# EAGLE board boost_controller (EAGLE 9.6.1)
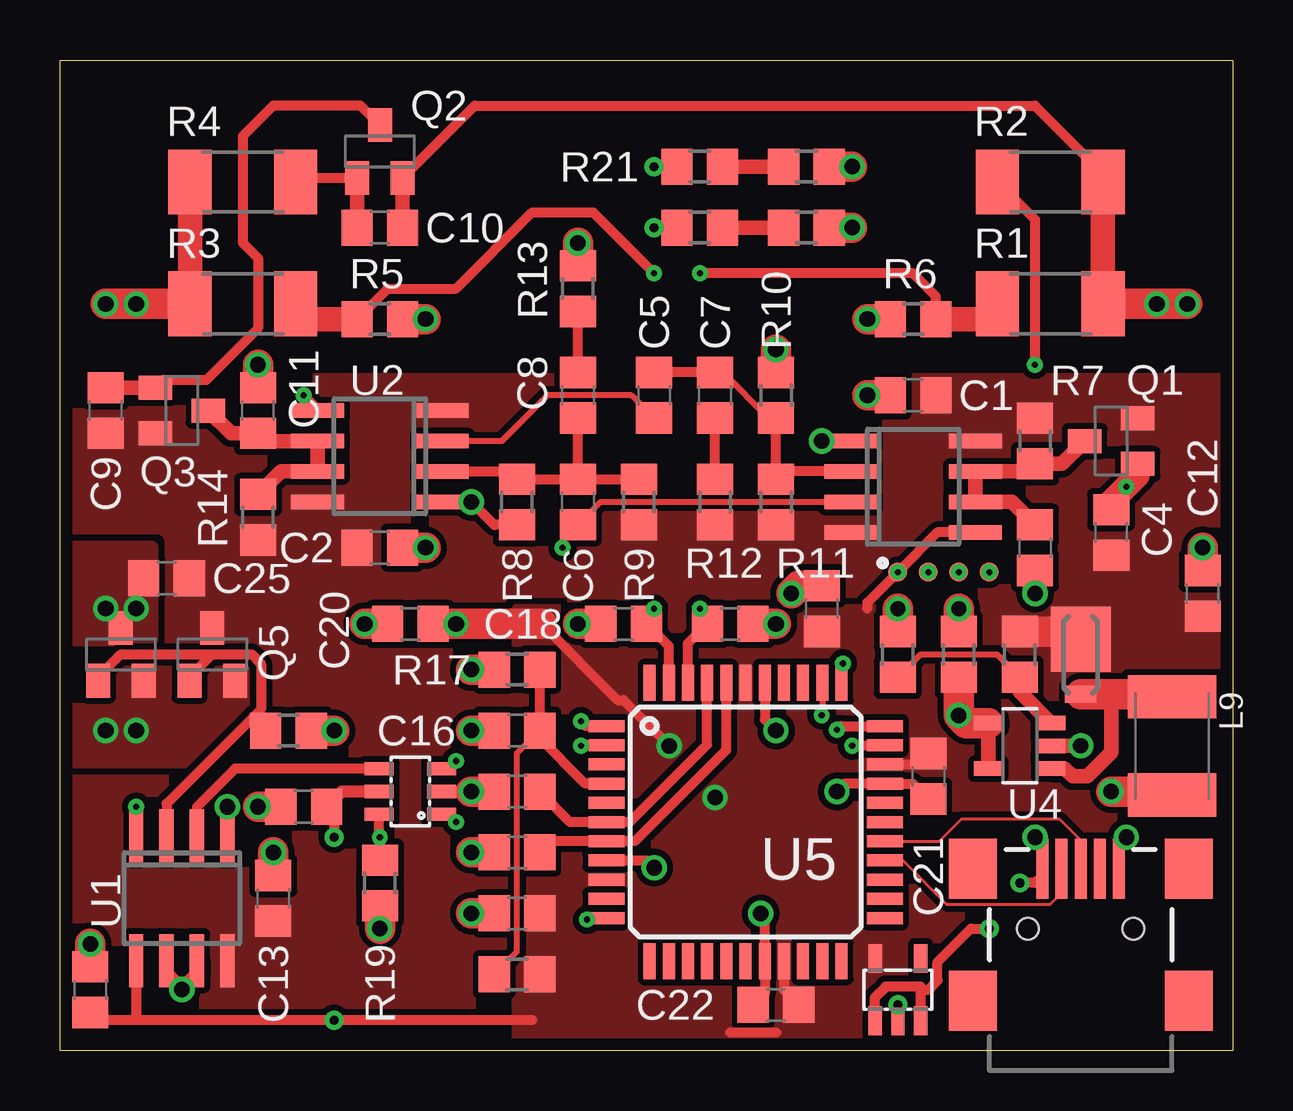
[diagram p0: board, top side]
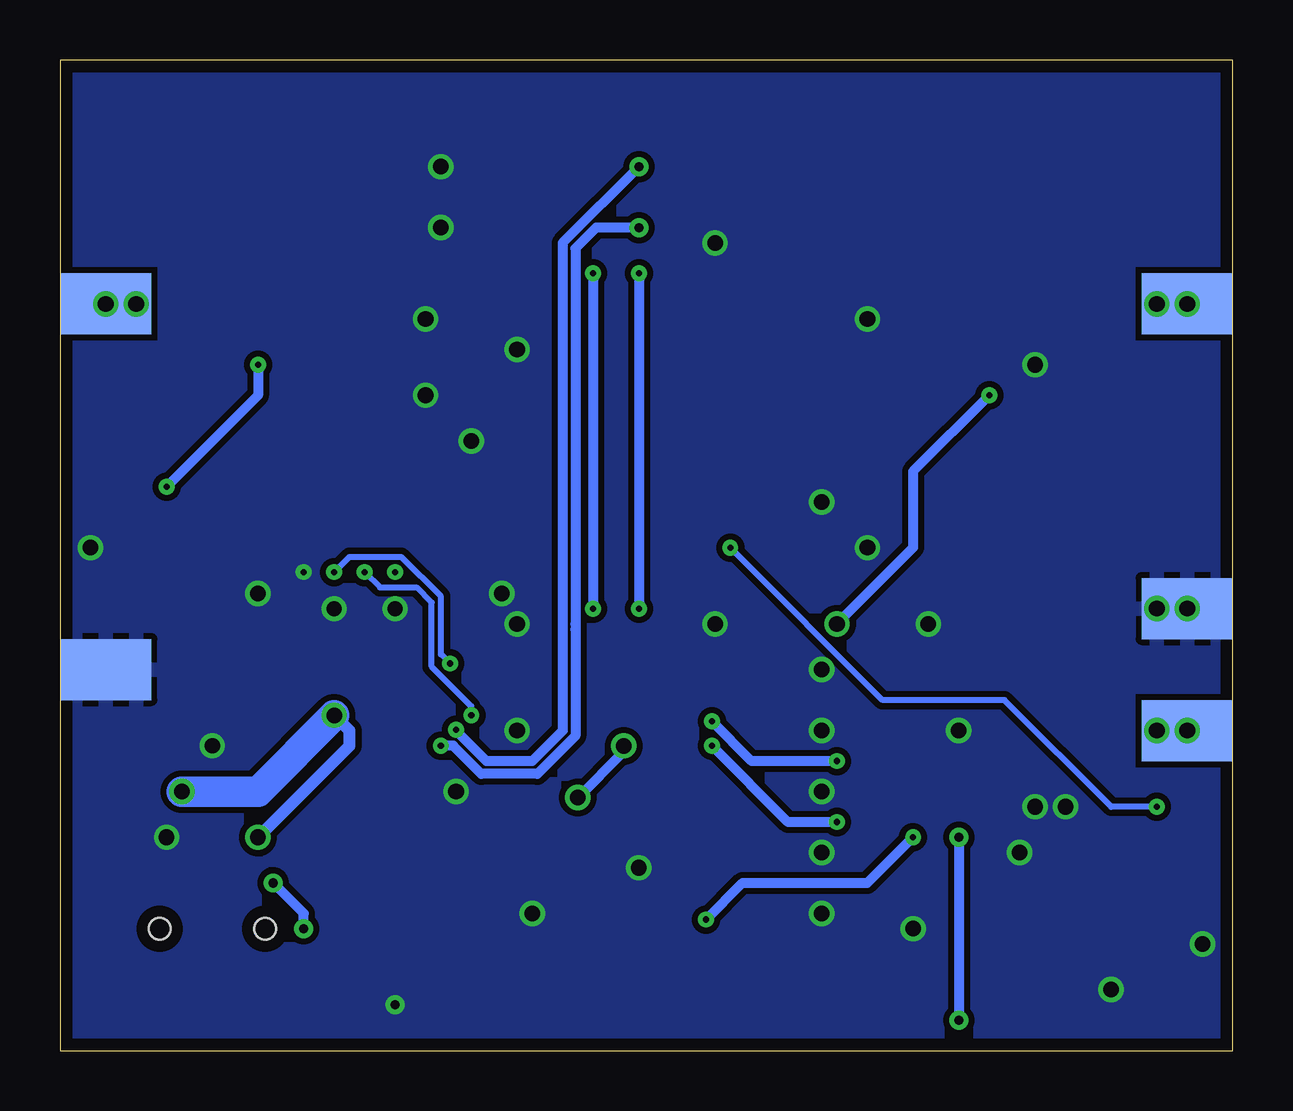
[diagram p1: board, bottom side, seen from below]

Size 48.9 x 41.27 mm. Coordinates in mm from the lower left corner, seen from the top.
Outline: 0,0 0,41.27 48.9,41.27 48.9,0 0,0
Copper layers (1*16): Top 0.035mm / dielectric 0.5mm / Bottom 0.035mm
Design rules "two_layer": minimum track width 5mil, minimum drill 10mil, track to track 5mil, track to pad 5mil, pad to pad 5mil, via to via 5mil, smd to smd 5mil, copper to edge 20mil, drill to drill 8mil, minimum pad ring 10mil, minimum via ring 8mil, stop-mask expansion 4mil, vias tented up to drill 0mil, thermal gap 10mil

## Footprints (pad centres in the part's own frame; a part is rotated, then mirrored left to right if it is on the bottom)
C0805 = smd 1.3 x 1.5: 1 -0.95,0; 2 0.95,0
R0805 = smd 1.3 x 1.5: 1 -0.95,0; 2 0.95,0
POWERMITE = smd 2.7 x 2.5: 1 -0.635,0 | smd 0.7 x 1.3: 2 1.665,0
TP08R = smd 0.8 x 0.8: TP 0,0
SMD1,27-2,54 = smd 1.27 x 2.54: 1 0,0
USB-MINIB = smd 2.5 x 0.5: D+ 2.5,0; D- 2.5,0.8; GND 2.5,-1.6; ID 2.5,-0.8; VBUS 2.5,1.6 | smd 2.5 x 2: S1 -3,4.5; S2 2.5,4.5; S3 -3,-4.5; S4 2.5,-4.5 | hole 0.9: 0,2.2; 0,-2.2
C1812K = smd 1.8 x 3.7: 1 -2.05,0; 2 2.05,0
SOT23-BEC = smd 1 x 1.4: B -0.95,-1.1; C 0,1.1; E 0.95,-1.1
R2010 = smd 1.8 x 2.7: 1 -2.2,0; 2 2.2,0
SO8 = smd 0.6 x 2.2: 1 -1.905,-2.6; 2 -0.635,-2.6; 3 0.635,-2.6; 4 1.905,-2.6; 5 1.905,2.6; 6 0.635,2.6; 7 -0.635,2.6; 8 -1.905,2.6
SOT23-5 = smd 0.6 x 1.2: 1 -0.95,-1.306; 2 0,-1.306; 3 0.95,-1.306; 4 0.95,1.306; 5 -0.95,1.306
TQFP44 = smd 1.5 x 0.5: 1 -5.8,4; 2 -5.8,3.2; 3 -5.8,2.4; 4 -5.8,1.6; 5 -5.8,0.8; 6 -5.8,0; 7 -5.8,-0.8; 8 -5.8,-1.6; 9 -5.8,-2.4; 10 -5.8,-3.2; 11 -5.8,-4; 23 5.8,-4; 24 5.8,-3.2; 25 5.8,-2.4; 26 5.8,-1.6; 27 5.8,-0.8; 28 5.8,0; 29 5.8,0.8; 30 5.8,1.6; 31 5.8,2.4; 32 5.8,3.2; 33 5.8,4 | smd 0.5 x 1.5: 12 -4,-5.8; 13 -3.2,-5.8; 14 -2.4,-5.8; 15 -1.6,-5.8; 16 -0.8,-5.8; 17 0,-5.8; 18 0.8,-5.8; 19 1.6,-5.8; 20 2.4,-5.8; 21 3.2,-5.8; 22 4,-5.8; 34 4,5.8; 35 3.2,5.8; 36 2.4,5.8; 37 1.6,5.8; 38 0.8,5.8; 39 0,5.8; 40 -0.8,5.8; 41 -1.6,5.8; 42 -2.4,5.8; 43 -3.2,5.8; 44 -4,5.8
SOT23-6L = smd 0.55 x 1.2: 1 -0.95,-1.3; 2 0,-1.3; 3 0.95,-1.3; 4 0.95,1.3; 5 0,1.3; 6 -0.95,1.3
SOT23-5L = smd 0.55 x 1.2: 1 -0.95,-1.3; 2 0,-1.3; 3 0.95,-1.3; 4 0.95,1.3; 5 -0.95,1.3

## Placement (x,y rotation side)
C1  100n  [C0805]  35.56,27.3 0 top
C2  100n  [C0805]  13.34,20.95 180 top
C3  470p  [C0805]  40.64,20.95 270 top
C4  1n  [C0805]  43.81,21.59 90 top
C5  22p  [C0805]  24.77,27.3 270 top
C6  22p  [C0805]  21.59,22.86 90 top
C7  100n  [C0805]  27.3,27.3 270 top
C8  100n  [C0805]  21.59,27.3 90 top
C9  1n  [C0805]  1.91,26.67 90 top
C10  1n  [C0805]  13.34,34.29 180 top
C11  470p  [C0805]  8.26,26.67 90 top
C12  10u  [C0805]  47.62,19.05 270 top
C13  100n  [C0805]  8.89,6.35 270 top
C14  100n  [C0805]  19.05,10.79 0 top
C15  100n  [C0805]  19.05,8.26 0 top
C16  100n  [C0805]  19.05,13.34 0 top
C17  10u  [R0805]  37.47,16.51 90 top
C18  1n  [C0805]  23.5,17.78 0 top
C19  1n  [C0805]  27.94,17.78 180 top
C20  100n  [C0805]  14.61,17.78 180 top
C21  100n  [C0805]  36.2,11.43 270 top
C22  100n  [C0805]  29.84,1.91 180 top
C23  100n  [C0805]  19.05,5.71 180 top
C24  100n  [C0805]  31.75,18.41 90 top
C25  10u  [C0805]  4.45,19.68 0 top
C26  10u  [C0805]  1.27,2.54 270 top
C27  100n  [C0805]  10.16,10.16 0 top
D1  [R0805]  31.11,36.83 0 top
D2  MBRM140T3G  [POWERMITE]  42.55,16.51 270 top
D3  [R0805]  31.11,34.29 0 top
E$2  [TP08R]  38.73,19.94 0 top
E$3  [TP08R]  36.2,19.94 0 top
E$4  [TP08R]  37.47,19.94 0 top
E$5  [TP08R]  34.92,19.94 0 top
J1  [SMD1,27-2,54]  45.72,31.11 0 bottom
J1.1  [SMD1,27-2,54]  46.99,31.11 0 bottom
J1.2  [SMD1,27-2,54]  48.26,31.11 0 bottom
J2  [SMD1,27-2,54]  45.72,15.88 0 bottom
J2.1  [SMD1,27-2,54]  46.99,15.88 0 bottom
J2.2  [SMD1,27-2,54]  48.26,15.88 0 bottom
J3  [SMD1,27-2,54]  3.17,31.11 0 bottom
J3.1  [SMD1,27-2,54]  1.91,31.11 0 bottom
J3.2  [SMD1,27-2,54]  0.64,31.11 0 bottom
J4  [SMD1,27-2,54]  3.17,18.41 0 bottom
J4.1  [SMD1,27-2,54]  1.91,18.41 0 bottom
J4.2  [SMD1,27-2,54]  0.64,18.41 0 bottom
J5  [SMD1,27-2,54]  3.17,13.34 0 bottom
J5.1  [SMD1,27-2,54]  1.91,13.34 0 bottom
J5.2  [SMD1,27-2,54]  0.64,13.34 0 bottom
J6  [USB-MINIB]  42.55,5.08 90 top
L9  LQH43CN100K03L  [C1812K]  46.35,12.7 270 top
Q1  MMBT3906  [SOT23-BEC]  43.81,25.4 90 top
Q2  FMMT597  [SOT23-BEC]  13.34,37.47 0 top
Q3  MMBT3906  [SOT23-BEC]  5.08,26.67 270 top
Q4  MMBT4403  [SOT23-BEC]  2.54,16.51 0 top
Q5  MMBT4401  [SOT23-BEC]  6.35,16.51 0 top
R1  470k  [R2010]  41.27,31.11 0 top
R2  330k  [R2010]  41.27,36.2 0 top
R3  470k  [R2010]  7.62,31.11 0 top
R4  348k  [R2010]  7.62,36.2 0 top
R5  4.7k  [R0805]  13.34,30.48 0 top
R6  4.7k  [R0805]  35.56,30.48 0 top
R7  300k  [R0805]  40.64,25.4 270 top
R8  4.7k  [R0805]  19.05,22.86 270 top
R9  4.7k  [R0805]  24.13,22.86 270 top
R10  4.7k  [R0805]  29.84,27.3 270 top
R11  4.7k  [R0805]  29.84,22.86 90 top
R12  1k  [R0805]  27.3,22.86 270 top
R13  1k  [R0805]  21.59,31.75 90 top
R14  10M  [R0805]  8.26,22.23 90 top
R15  43.2k  [R0805]  40.01,16.51 270 top
R16  5k  [R0805]  34.92,16.51 270 top
R17  2.5k  [R0805]  19.05,15.88 180 top
R18  806  [R0805]  19.05,3.17 180 top
R19  4.7k  [R0805]  13.34,6.99 270 top
R20  [R0805]  26.67,34.29 180 top
R21  [R0805]  26.67,36.83 180 top
R22  4.7k  [R0805]  9.53,13.34 0 top
U1  TLC555  [SO8]  5.08,6.35 180 top
U2  TLC555  [SO8]  13.34,24.77 90 top
U3  TLC555  [SO8]  35.56,23.5 270 top
U4  MIC2288  [SOT23-5]  40.01,12.7 90 top
U5  [TQFP44]  28.57,9.53 0 top
U6  SN74LVC1G10  [SOT23-6L]  14.61,10.79 90 top
U7  MIC5317-3.3  [SOT23-5L]  34.92,2.54 0 top

## Library data of the parts
C1-C27 D1 D3 L9 Q1-Q5 R1-R22 U1-U3 U6 U7 = ref-packages
D2 = diode
E$2-E$5 = testpad
J1 J1.1 J1.2 J2 J2.1 J2.2 J3 J3.1 J3.2 J4 J4.1 J4.2 J5 J5.1 J5.2 = wirepad
J6 = SparkFun-Connectors
U4 = linear
U5 = atmel

## Nets
3.3V: C20.1 C21.1 C22.1 C23.1 C24.1 C26.2 C27.2 E$5.TP R18.1 U1.5 U2.5 U3.5 U5.9 U5.19 U5.31 U5.39 U6.5 U7.5
12V: C1.2 C2.2 C4.1 C9.1 C12.2 C13.2 C25.2 D2.1 Q1.E Q3.E Q5.C R7.1 R9.2 R11.1 R12.2 R14.1 R15.1 U1.8 U2.4 U2.8 U3.4 U3.8
!RESET: E$3.TP U5.35
ACT: D1.1 R21.1
COMP1: U5.1 U6.3
COMP2: U5.2 U6.1
DAMP1: C7.2 R12.1
DAMP2: C8.2 R13.1
FB12: R15.2 R16.2 U4.3
FB_IN: C19.2 R1.1 R6.2 U5.42
FB_OUT: C18.2 R3.2 R5.1 U5.43
GATE: J5.1 J5.1.1 J5.2.1 Q4.E Q5.E
GND: C1.1 C2.1 C3.2 C11.2 C12.1 C13.1 C14.1 C15.1 C16.1 C17.2 C18.1 C19.1 C20.2 C21.2 C22.2 C23.2 C24.2 C25.1 C26.1 C27.1 D1.2 D3.2 E$2.TP J2.1 J2.1.1 J2.2.1 J4.1 J4.1.1 J4.2.1 J6.GND Q4.C R5.2 R6.1 R8.2 R10.1 R13.2 R16.1 R17.2 R19.2 R22.2 U1.1 U1.6 U1.7 U2.1 U3.1 U4.2 U5.8 U5.18 U5.30 U5.38 U6.2 U7.2
LED1: R20.2 U5.32
LED2: R21.2 U5.33
OSC1: C3.1 Q1.C R7.2 U3.6 U3.7
OSC2: C11.1 Q3.C R14.2 U2.6 U2.7
OUT1: C6.1 U1.4 U3.3
OUT2: C5.2 U2.3
PDI: E$4.TP U5.34
S$1: J6.D+ U5.27
S$2: J6.D- U5.26
S$3: Q4.B Q5.B R22.1 U1.3
S$4: U1.2 U6.4
S$5: R19.1 U5.11 U6.6
SENSE1: C4.2 Q1.B R2.1
SENSE2: C9.2 Q2.C Q3.B
SENSE3: C10.2 Q2.B R4.2
SET1: C14.2 U5.6 U5.41
SET2: C15.2 U5.7 U5.40
SW: D2.2 L9.1 U4.1
TRIG1: C5.1 C7.1 R10.2 R11.2 U3.2
TRIG2: C6.2 C8.1 R8.1 R9.1 U2.2
TRK: D3.1 R20.1
VBUS: C17.1 J6.VBUS L9.2 U4.4 U4.5 U7.1 U7.3
VIN: C10.1 J1.1 J1.1.1 J1.2.1 Q2.E R1.2 R2.2
VOUT: J3.1 J3.1.1 J3.2.1 R3.1 R4.1
VREF: C16.2 R17.1 R18.2 U5.4

## Tracks (layer width: path | path; a pad name or v marks a point on that pad's centre or on a via)
3.3V  (via drill 0.25, 0.38, 0.65)
  Top 0.406: U2.5 10.73,26.73 v10.16,27.3 | 33.66,18.41 33.66,18.67 E$5.TP 36.58,21.59 U3.5 | 20.07,17.78 23.24,14.61 23.5,14.61 v25.4,12.7 | U5.31 35.74,11.93 C21.1 | U5.19 30.18,2.52 C22.1 | C26.2 1.59,1.27 3.17,1.27 | 19.68,1.27 v11.43,1.27 3.17,1.27 | U1.5 3.17,1.27 | C27.2 11.43,9.84 v11.43,8.89 | 27.94,0.76 29.84,0.76
  Top 0.508: C27.2 11.74,10.79 U6.5
  Top 1.27: 20.07,17.78 v16.51,17.78 C20.1
  Bottom 0.406: v10.16,27.3 13.34,24.13 13.34,20.95 v16.51,17.78 | v25.4,12.7 25.4,12.45 v27.3,10.54 | v11.43,8.89 v11.43,1.27
  other vias: 34.92,19.94
  pour Top (isolate 0.254, rank 5, no thermals): 19.05,18.41 48.9,18.41 48.9,0 19.05,0
12V
  Top 1.27: R15.1 42.23,17.46 D2.1
  pour Top (isolate 0.254, rank 6, no thermals): 0,27.94 48.9,27.94 48.9,0 0,0
  pour Top (isolate 0.254, rank 4, no thermals): 41.27,20.95 48.9,20.95 48.9,15.88 41.27,15.88
!RESET  (via drill 0.25)
  Top 0.254: U5.35 31.77,13.99 v31.75,13.97
  Bottom 0.254: v31.75,13.97 31.75,14.35 33.4,16 33.4,18.67 34.04,19.3 35.56,19.3 E$3.TP
  other vias: 36.2,19.94
ACT
  Top 0.61: D1.1 R21.1
COMP1  (via drill 0.25)
  Top 0.406: U5.1 21.91,13.53 v21.72,13.72 | U6.3 16.19,11.74 v16.51,12.06
  Bottom 0.406: v21.72,13.72 20.07,12.06 v16.51,12.06
COMP2  (via drill 0.25)
  Top 0.406: U5.2 21.74,12.72 v21.72,12.7 | U6.1 16.19,9.85 v16.51,9.53
  Bottom 0.406: v16.51,9.53 18.54,9.53 v21.72,12.7
DAMP1
  Top 0.406: R12.1 C7.2
DAMP2
  Top 0.406: C8.2 R13.1
FB12
  Top 0.254: R16.2 35.88,16.51 39.05,16.51 R15.2
  Top 0.61: U4.3 40.01,14.96 R15.2
FB_IN  (via drill 0.25)
  Top 0.406: U5.42 26.18,16.96 C19.2 26.99,18.09 v26.67,18.41 | R6.2 36.51,31.43 35.56,32.38 v26.67,32.38
  Top 1.016: R6.2 38.44,30.48 R1.1
  Bottom 0.406: v26.67,32.38 v26.67,18.41
FB_OUT  (via drill 0.25)
  Top 0.406: U5.43 25.38,16.85 C18.2 24.45,18.09 v24.77,18.41 | R5.1 13.65,31.75 16.51,31.75 19.68,34.92 22.23,34.92 v24.77,32.38
  Top 1.016: R5.1 10.46,30.48 R3.2
  Bottom 0.406: v24.77,32.38 v24.77,18.41
GATE  (via drill 0.65)
  Bottom 0.61: J5.2.1 J5.1.1
  other vias: 1.91,13.34 3.17,13.34
  pour Bottom (isolate 0.635, no thermals): 0,14.61 3.81,14.61 3.81,12.06 0,12.06
  pour Top (isolate 0.254, rank 3, no thermals): 0.64,15.88 7.62,15.88 7.62,13.97 5.71,12.06 0.64,12.06
GND  (via drill 0.25, 0.38, 0.64, 0.65)
  Top 0.406: R8.2 18.09,21.91 v17.14,22.86 | U5.8 24.46,7.92 v24.77,7.62 | v29.21,5.71 29.38,5.55 U5.18 29.38,2.38 C22.2 | U5.38 29.38,13.8 v29.84,13.34 | v32.38,10.79 32.72,11.12 U5.30 35.55,11.12 C21.2 | U7.2 v34.92,1.91
  Top 0.508: J6.GND 44.15,8.59 v44.45,8.89 | U6.2 v17.14,10.79
  Top 0.61: U1.6 4.45,3.17 v5.08,2.54 5.71,3.17 U1.7 | U1.1 v6.99,10.16 | U2.1 v17.14,22.86 | U3.1 v31.75,25.4 | U4.2 v42.55,12.7
  Top 1.016: C3.2 v40.64,19.05
  Top 1.27: R5.2 v15.24,30.48 | R6.1 v33.66,30.48 | C1.1 v33.66,27.3 | C2.1 v15.24,20.95 | R13.2 v21.59,33.66 | C13.1 v8.89,8.26 | C12.1 v47.62,20.95 | R16.1 v34.92,18.41 | C17.2 v37.47,18.41 | C14.1 v17.14,10.79 | C15.1 v17.14,8.26 | R17.2 v17.14,15.88 | C16.1 v17.14,13.34 | C18.1 v21.59,17.78 | C19.1 v29.84,17.78 | C20.2 v12.7,17.78 | C23.2 v17.14,5.71 | R10.1 v29.84,29.21 | C24.2 30.8,19.36 v30.48,19.05 | C26.1 v1.27,4.45 | C27.1 v8.26,10.16 | R19.2 v13.34,5.08 | D1.2 v33.02,36.83 | D3.2 v33.02,34.29 | C11.2 v8.26,28.57 | R22.2 v11.43,13.34
  other vias: 1.91,18.41 3.17,18.41 38.73,19.94
  pour Bottom (isolate 0.254, rank 6): 0,41.27 48.9,41.27 48.9,0 0,0
  pour Bottom (isolate 0.61, rank 4, no thermals): 0,19.68 3.81,19.68 3.81,17.14 0,17.14
  pour Bottom (isolate 0.61, rank 4, no thermals): 45.09,17.14 48.9,17.14 48.9,14.61 45.09,14.61
  pour Top (isolate 0.254, rank 3, no thermals): 0.64,17.14 3.81,17.14 3.81,20.95 0.64,20.95
LED1  (via drill 0.25, 0.38)
  Top 0.406: R20.2 v24.77,34.29 | v33.02,12.7 33.05,12.72 U5.32
  Bottom 0.406: v24.77,34.29 26.54,34.29 27.41,33.43 27.41,17.78 27.41,17.55 27.41,13.11 28.99,11.53 31.34,11.53 32.51,12.7 v33.02,12.7
LED2  (via drill 0.25, 0.38)
  Top 0.406: R21.2 v24.77,36.83 | v32.38,13.36 32.55,13.53 U5.33
  Bottom 0.406: v24.77,36.83 27.94,33.66 27.94,13.34 29.21,12.06 31.11,12.06 32.38,13.34 v32.38,13.36
OSC1
  Top 0.61: C3.1 39.69,22.86 U3.6 U3.7 40.32,24.13 R7.2 41.77,24.45 Q1.C
OSC2
  Top 0.61: R14.2 9.21,24.13 U2.7 U2.6 8.57,25.4 C11.1 7.13,25.72 Q3.C
OUT1  (via drill 0.25)
  Top 0.254: U3.3 22.54,22.86 C6.1 20.95,21.27 v20.95,20.95 | U1.4 v3.17,10.16
  Bottom 0.254: v3.17,10.16 5.08,10.16 9.53,14.61 14.61,14.61 v20.95,20.95
OUT2
  Top 0.254: C5.2 23.82,27.3 20.32,27.3 18.41,25.4 U2.3
PDI  (via drill 0.25)
  Top 0.254: U5.34 32.58,16.07 v32.64,16.13
  Bottom 0.254: v32.64,16.13 33.02,16.51 33.02,18.92 34.67,20.57 36.83,20.57 E$4.TP
  other vias: 37.47,19.94
S$1
  Top 0.127: U5.27 36.66,8.72 37.59,9.65 41.66,9.65 42.55,8.76 J6.D+
S$2
  Top 0.127: U5.26 35.13,7.92 36.95,6.1 41.28,6.1 41.74,6.57 J6.D-
S$3
  Top 0.406: Q4.B 1.59,15.56 2.54,16.51 6.35,16.51 | 8.19,14.03 8.38,14.22 8.38,16.13 8,16.51 6.35,16.51 | 8.19,14.03 4.45,10.29 U1.3 | Q5.B 5.4,15.56 6.35,16.51 | R22.1 8.19,13.72 8.19,14.03
S$4
  Top 0.406: U1.2 5.71,10.16 7.3,11.74 U6.4
S$5  (via drill 0.25)
  Top 0.406: U5.11 22.04,5.53 v21.97,5.46 | U6.6 13.3,8.92 v13.34,8.89 R19.1
  Bottom 0.406: v21.97,5.46 20.45,6.99 15.24,6.99 v13.34,8.89
SENSE1  (via drill 0.25)
  Top 0.406: R2.1 40.64,34.63 v40.64,28.57
  Top 1.016: C4.2 43.81,22.86 v44.45,23.5 44.91,23.96 Q1.B
  Bottom 0.406: v40.64,28.57 40.64,27.3 v44.45,23.5
SENSE2
  Top 0.406: Q2.C 12.53,39.37 8.89,39.37 7.62,38.1 7.62,33.66 8.26,33.02 8.26,30.1 6.1,27.94 4.3,27.94 Q3.B
  Top 0.61: C9.2 Q3.B
SENSE3
  Top 0.406: R4.2 9.99,36.37 Q2.B
  Top 0.61: C10.2 Q2.B
SET1
  Top 0.406: U5.41 26.98,12.75 23.75,9.53 U5.6 21.27,9.53 C14.2
SET2
  Top 0.406: U5.40 27.77,12.54 23.96,8.72 U5.7 20.47,8.72 C15.2
SW
  Top 0.61: U4.1 41.89,11.75 42.21,11.43 42.81,11.43 43.81,12.43 43.81,14.85
  Top 1.016: 46.21,14.61 L9.1
  Top 1.27: D2.2 43.81,14.85 45.97,14.85 46.21,14.61
TRIG1
  Top 0.254: R10.2 29.52,26.36 27.62,28.25 C7.1
  Top 0.406: U3.2 30.16,24.13 R11.2 R10.2 | C7.1 C5.1
TRIG2
  Top 0.406: U2.2 18.73,24.13 R8.1 C6.2 | C6.2 R9.1 | C6.2 C8.1
TRK
  Top 0.61: D3.1 R20.1
VBUS  (via drill 0.38, 0.65)
  Top 0.406: U7.1 33.98,2.23 34.42,2.67 35.88,2.67 35.88,2.54 | U7.3 35.88,2.54 | 35.88,2.54 36.2,2.54 36.58,2.92 36.58,3.68 37.97,5.08 v38.73,5.08 | J6.VBUS 40.95,7.29 40.64,6.99 v40.01,6.99
  Top 0.508: J6.VBUS 40.95,8.59 v40.64,8.89
  Top 0.61: U4.5 U4.4
  Top 1.27: C17.1 v37.47,13.97 37.78,13.65 U4.4 | v43.81,10.79 46.21,10.79 L9.2
  Bottom 0.406: v38.73,5.08 38.73,5.71 v40.01,6.99
  Bottom 0.508: v40.64,8.89 36.83,12.7 36.83,13.34 v37.47,13.97
  Bottom 1.27: v37.47,13.97 40.64,10.79 v43.81,10.79
VIN  (via drill 0.65)
  Top 0.406: Q2.E 17.29,39.37 40.64,39.37 43.48,36.53 R2.2
  Top 0.61: C10.1 Q2.E
  Top 1.016: R1.2 R2.2
  Top 1.27: R1.2 J1.1 J1.1.1
  Bottom 0.61: J1.2.1 J1.1.1
  other vias: 46.99,31.11 45.72,31.11
  pour Bottom (isolate 1.27, no thermals): 45.09,32.38 45.09,29.84 48.9,29.84 48.9,32.38
VOUT  (via drill 0.65)
  Top 1.016: R3.1 R4.1
  Top 1.27: R3.1 J3.1 J3.1.1
  Bottom 0.61: J3.2.1 J3.1.1
  other vias: 1.91,31.11 3.17,31.11
  pour Bottom (isolate 1.27, no thermals): 0,32.38 3.81,32.38 3.81,29.84 0,29.84
VREF
  Top 0.254: R18.2 19.05,4.12 19.05,12.38 C16.2
  Top 0.406: U5.4 21.89,11.12 20,13.02 C16.2 R17.1

## Text on the board
tDocu: ACT | TRK